# Altium PCB PCB_Audio Output_Single_Layer_with_Jumpers.pcbdoc
Units mm, origin at the board's own origin, x right, y up, seen from the top; angles counter-clockwise.
Board outline 90.97 x 93.4 mm, 2 copper layers (Top Layer, Bottom Layer); 22 components, 13 nets, 85 pads, 0 vias.
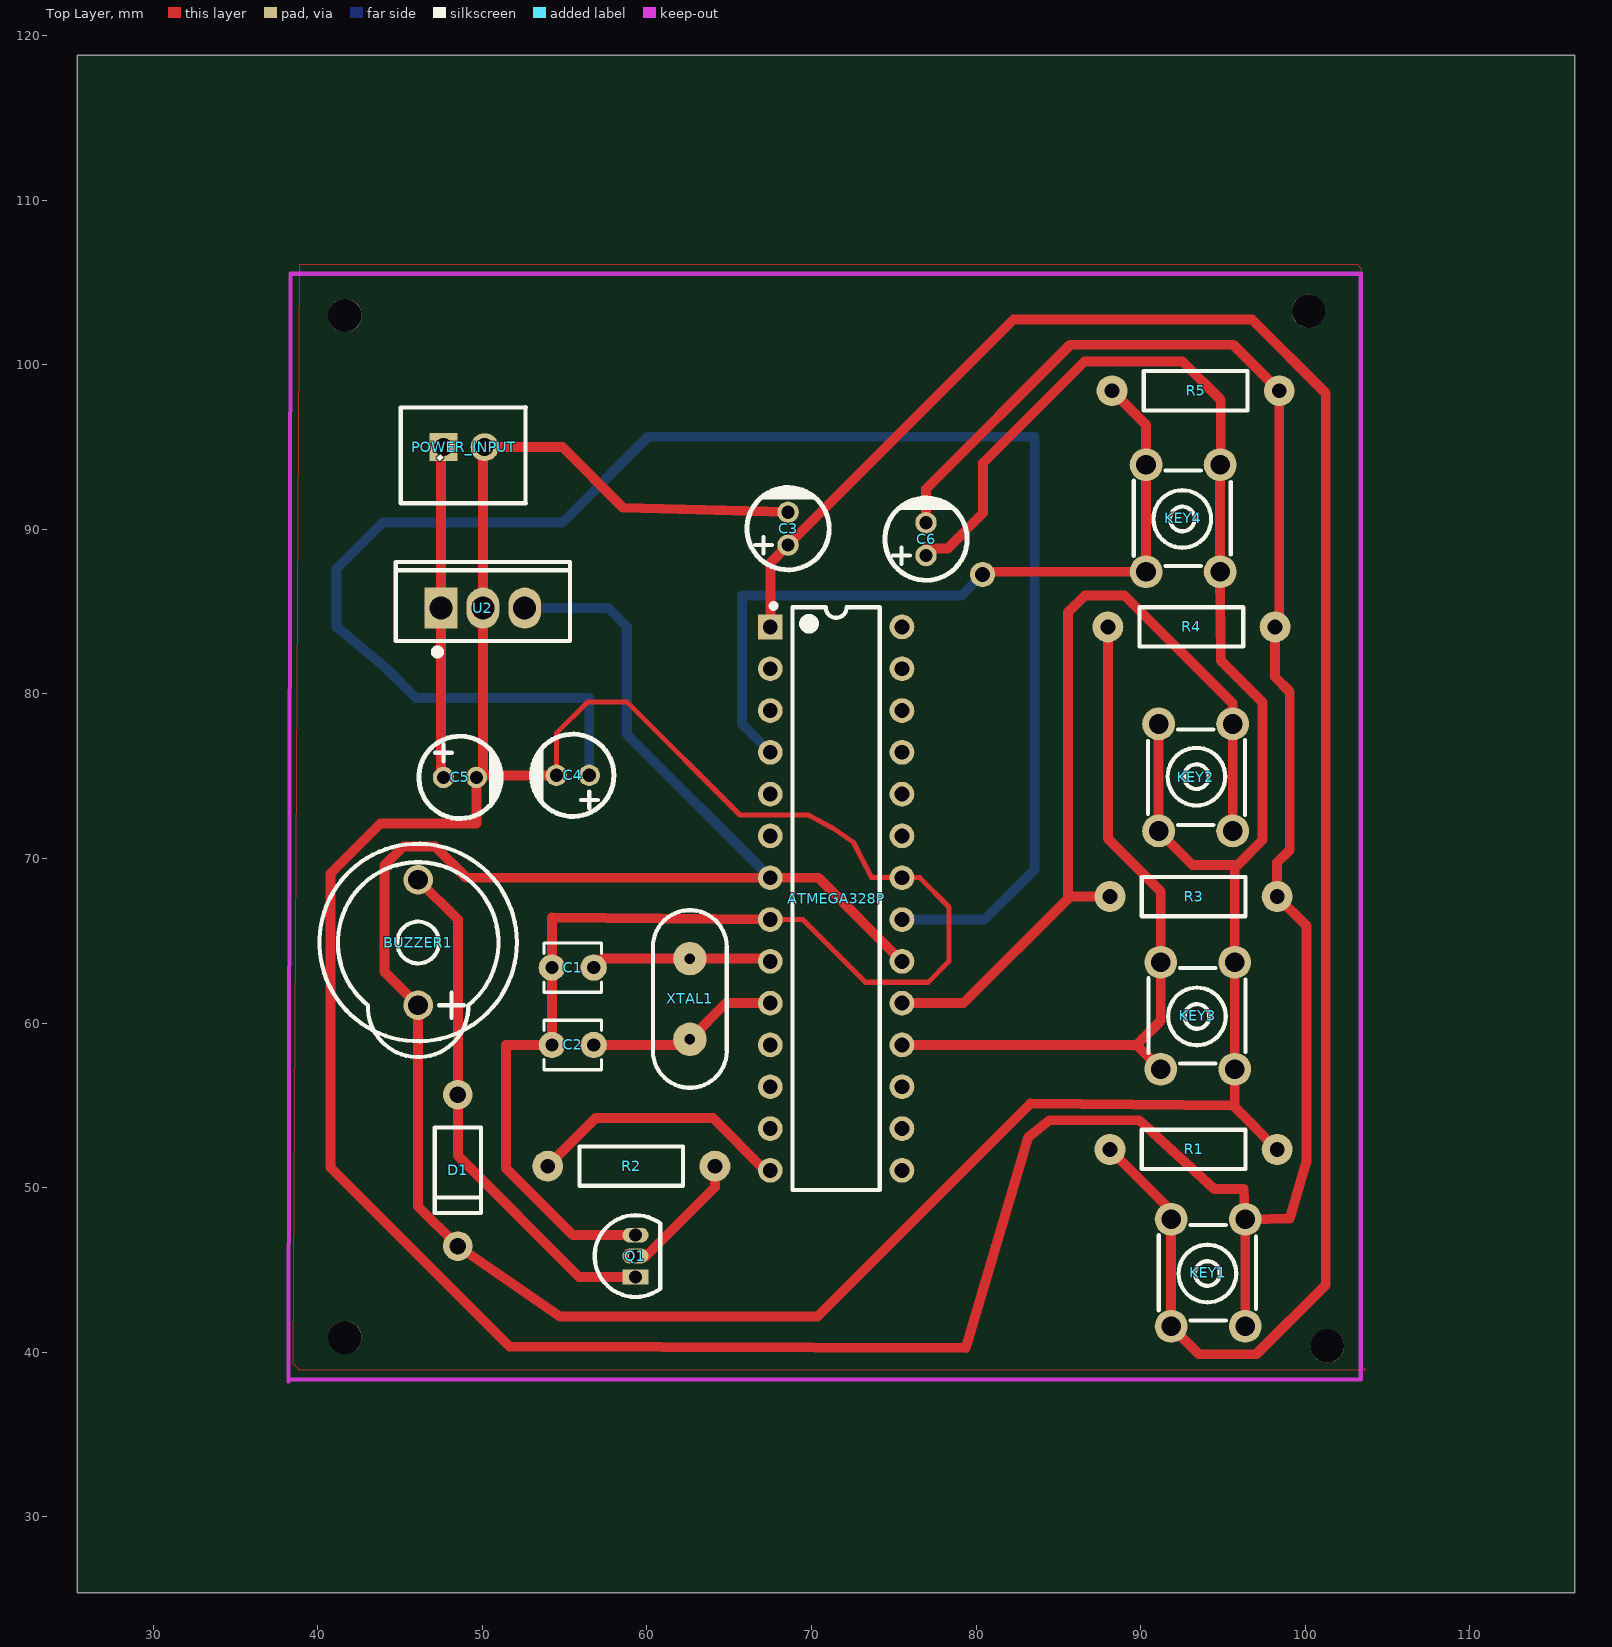
[diagram p0: Top Layer view]
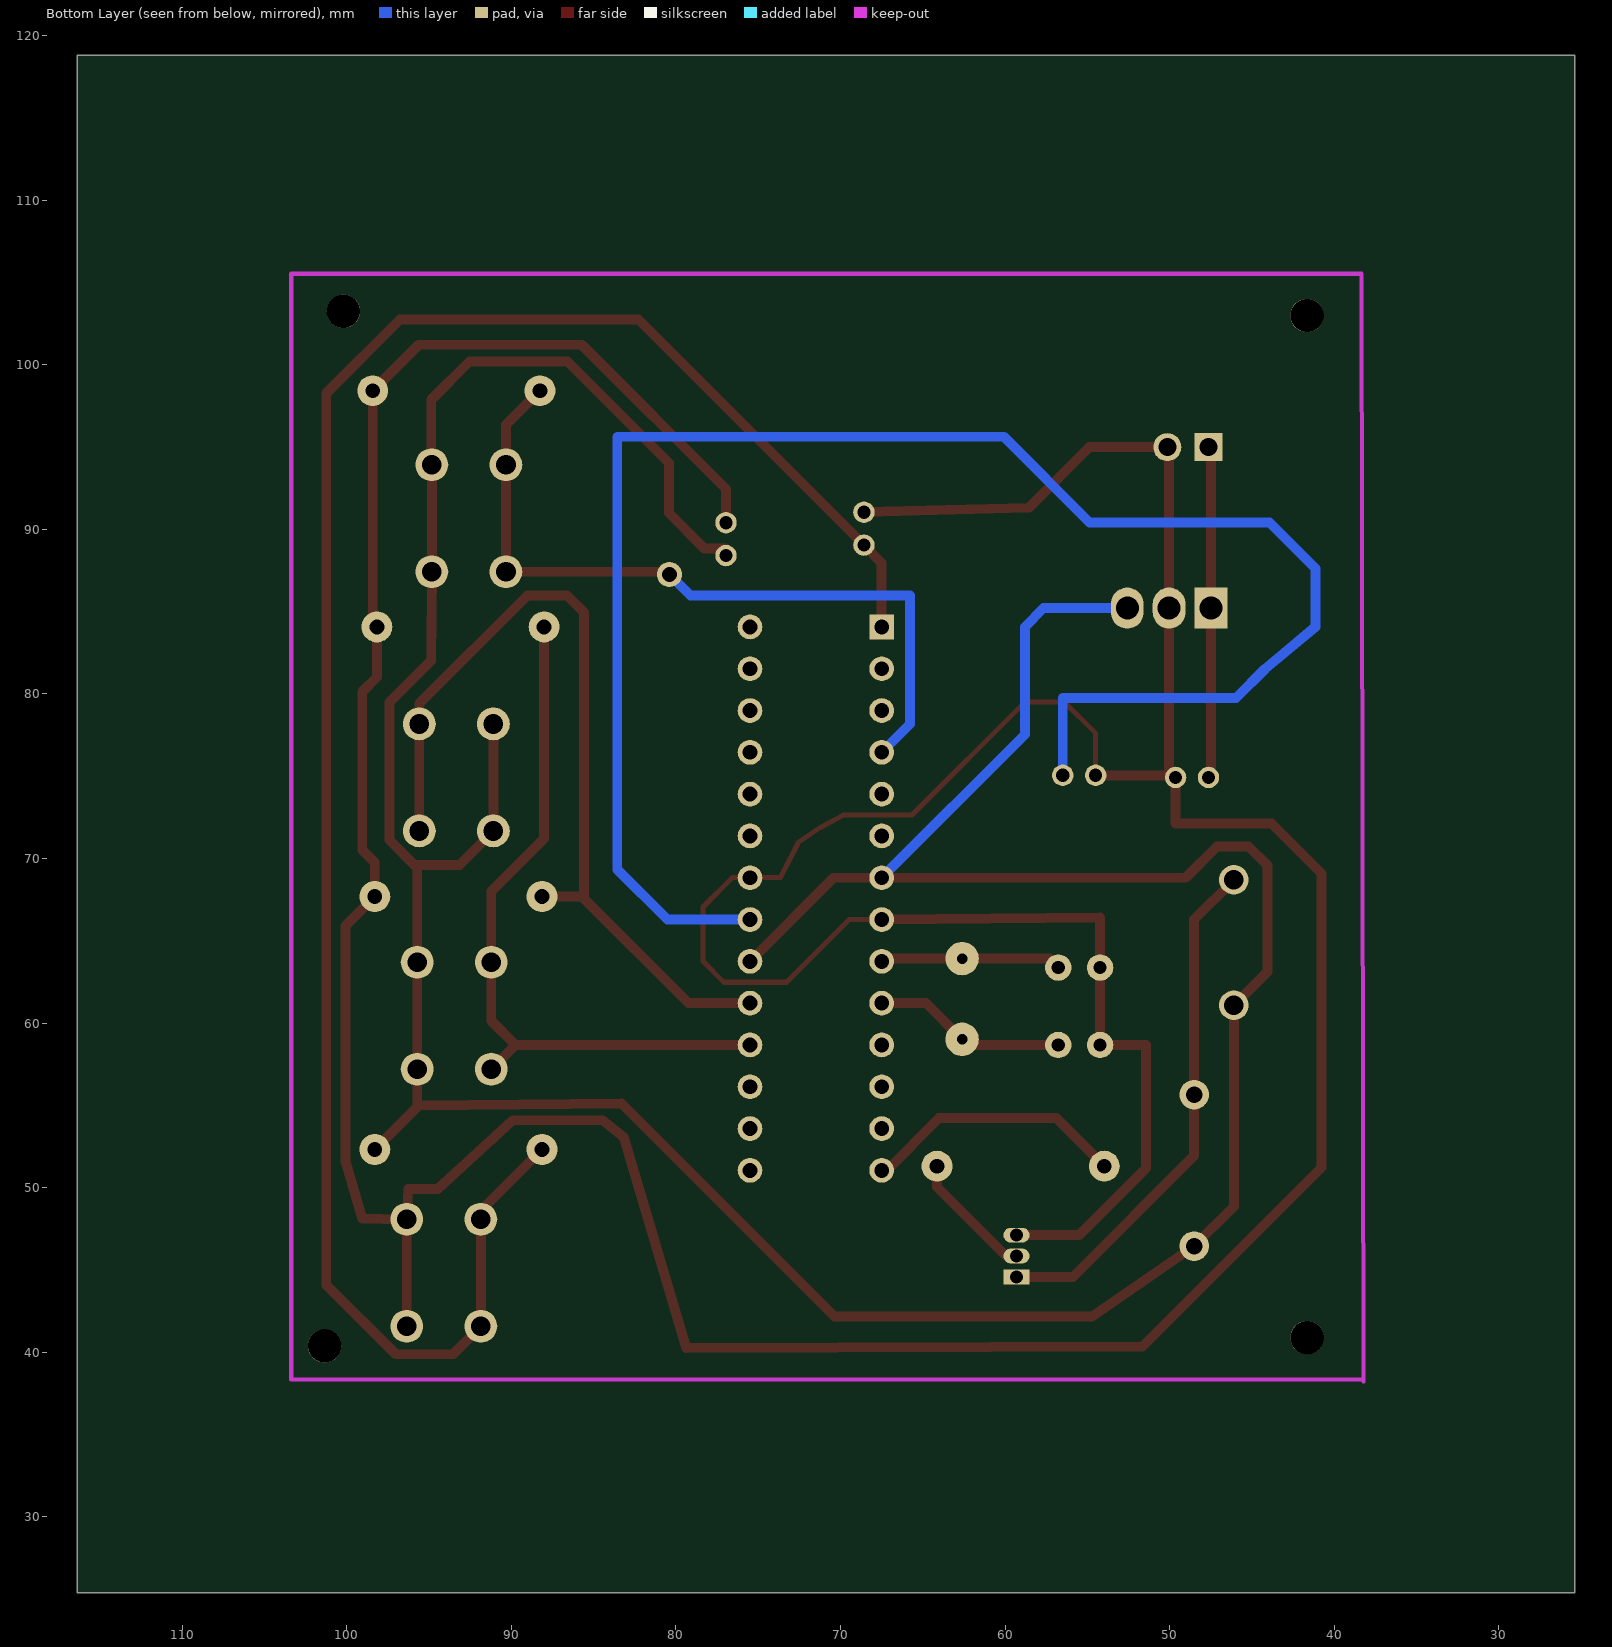
[diagram p1: Bottom Layer view, seen from below]

## Layer stack, top to bottom
Top Layer: signal copper (thickness not stored)
Dielectric: dielectric 0.32, FR-4, Dk 4.8
Bottom Layer: signal copper (thickness not stored)

## Board outline
116.368,25.4 25.4,25.4 25.4,118.798 116.368,118.798

## Components (designator, comment, footprint, x,y, rotation, side; value= is the part's Value field where it differs from the comment)
ATMEGA328P "ATMEGA _328P-PU" DIP-28_L34.6-W7.3-P2.54-LS10.2-BL 71.501,67.564 r270 top
BUZZER1 "5V_BUZZER" DIP-BUZZER-12X6 46.101,64.897 r180 top
C1 "22pF" CAP-TH_L3.5-W3.0-P2.54-D0.8 55.499,63.373 r0 top
C2 "22pF" CAP-TH_L3.5-W3.0-P2.54-D0.8 55.499,58.674 r0 top
C3 "100nF" CAP-TH_BD5.0-P2.00-D0.8-FD 68.58,90.043 r90 top
C4 "100nF" CAP-TH_BD5.0-P2.00-D0.8-FD 55.499,75.057 r180 top
C5 "330nF" CAP-TH_BD5.0-P2.00-D0.8-FD 48.641,74.93 r0 top
C6 "100nF" CAP-TH_BD5.0-P2.00-D0.8-FD 76.962,89.408 r90 top
D1 "1N4001_Diode" DO-41_BD2.4-L4.7-P8.70-D0.9-RD 48.514,51.054 r90 top
KEY1 "Reset_Button" KEY-TH_4P-L6.0-W6.0-P4.50 94.107,44.831 r90 top
KEY2 "PLAY" KEY-TH_4P-L6.0-W6.0-P4.50 93.345,74.93 r270 top
KEY3 "CHANGE SONG" KEY-TH_4P-L6.0-W6.0-P4.50 93.472,60.452 r90 top
KEY4 "STOP" KEY-TH_4P-L6.0-W6.0-P4.50 92.583,90.678 r90 top
POWER_INPUT "JST_2 PIN" CONN-TH_XHB-2A 48.895,94.996 r180 top
Q1 "BC547B_NPN_Transistor" TO-92-3_L4.9-W3.7-P1.27-L 59.309,45.847 r90 top
R1 "10K" AXIAL-0.4 93.218,52.324 r0 top
R2 "220Ω" AXIAL-0.4 59.055,51.308 r0 top
R3 "330Ω" AXIAL-0.4 93.218,67.691 r180 top
R4 "330Ω" AXIAL-0.4 93.091,84.074 r180 top
R5 "330Ω" AXIAL-0.4 93.345,98.425 r180 top
U2 "7805_Regulator" TO-220-3_L10.0-W4.5-P2.54-L 50.038,85.217 r0 top
XTAL1 "16MHz" "16MHZ_OSC [PCB]" 62.611,61.468 r0 top

## Footprints (in the part's own frame and the unit in brackets; to place one, negate y for a bottom-side part, rotate by r counter-clockwise, add the part's x,y. Pads: shape width x height; smd on the part's side, far side on the other; paste and mask are expansions set on the pad)
"16MHZ_OSC [PCB]" [mil]
  round 80 hole 25: 1(0,96.46) 2(0,-96.46)
  silkscreen extent -88,-212 88,212
AXIAL-0.4 [mil]
  round 74 hole 35.4: 1(-200,0) 2(200,0)
  silkscreen extent -124,-47 124,47
CAP-TH_BD5.0-P2.00-D0.8-FD [mm]
  round 1.3 hole 0.8: 1(-1,0) 2(1,0)
  silkscreen extent -2.5,-2.5 2.5,2.5
CAP-TH_L3.5-W3.0-P2.54-D0.8 [mm]
  round 1.6 hole 0.8: 1(-1.27,0) 2(1.27,0)
  silkscreen extent -1.75,-1.5 1.75,1.5
CONN-TH_XHB-2A [mm]
  rect 1.7x1.7 hole 1.1: 1(1.251,0)
  round 1.7 hole 1.1: 2(-1.251,0)
  silkscreen extent -3.75,-2.42 3.86,3.4
DIP-28_L34.6-W7.3-P2.54-LS10.2-BL [mm]
  rect 1.5x1.5 hole 0.9: 1(-16.51,-4)
  round 1.5 hole 0.9: 2(-13.97,-4) 3(-11.43,-4) 4(-8.89,-4) 5(-6.35,-4) 6(-3.81,-4) 7(-1.27,-4) 8(1.27,-4) 9(3.81,-4) 10(6.35,-4) 11(8.89,-4) 12(11.43,-4) 13(13.97,-4) 14(16.51,-4) 15(16.51,4) 16(13.97,4) 17(11.43,4) 18(8.89,4) 19(6.35,4) 20(3.81,4) 21(1.27,4) 22(-1.27,4) 23(-3.81,4) 24(-6.35,4) 25(-8.89,4) 26(-11.43,4) 27(-13.97,4) 28(-16.51,4)
  silkscreen extent -17.94,-3.95 17.7,2.65
DIP-BUZZER-12X6 [mm]
  round 1.8 hole 1.2: 1(0,3.81) 2(0,-3.81)
  silkscreen extent -6,-6 6,6.96
DO-41_BD2.4-L4.7-P8.70-D0.9-RD [mm]
  round 1.8 hole 1: 1(-4.6,0) 2(4.6,0)
  silkscreen extent -2.6,-1.4 2.6,1.4
KEY-TH_4P-L6.0-W6.0-P4.50 [mm]
  round 2 hole 1.2: 1(-3.25,-2.25) 2(3.25,-2.25) 3(3.25,2.25) 4(-3.25,2.25)
  silkscreen extent -2.9,-2.9 2.9,3
TO-92-3_L4.9-W3.7-P1.27-L [mm]
  rect 0.9x1.6 hole 0.8: 1(-1.27,0)
  oval 0.9x1.6 hole 0.8: 2(0,0) 3(1.27,0)
  silkscreen extent -2.48,-1.5 2.48,2.48
TO-220-3_L10.0-W4.5-P2.54-L [mm]
  rect 2x2.5 hole 1.4: 1(-2.54,0)
  oval 2x2.5 hole 1.4: 2(0,0) 3(2.54,0)
  silkscreen extent -5.3,-2.86 5.3,2.8

## Free pads (board coordinates)
  round 1.524 hole 0.914: 2(80.399,87.255)
  round 2.032 hole 2.032 unplated: ""(41.656,40.894) ""(41.656,102.997) ""(100.203,103.251) ""(101.346,40.386)

## Nets (pads, with @x,y where several pads share a name; then routed paths per layer and width w, separated by ;. In a path a pad name is that pad's centre, name@x,y a point inside that pad or via, vN(x,y) a via of type N, cw(c..) or ccw(c..) an arc to the next point about the centre after c; other vN are vias at no path point)
5V: ATMEGA328P.7 ATMEGA328P.20 BUZZER1.1 C6.1 D1.1 KEY2.1 KEY2.2 KEY3.1 KEY3.2 KEY4.1 KEY4.2 R1.2 U2.3 | length 224.8
  Top Layer w0.6: ATMEGA328P.20 70.421,68.834 ATMEGA328P.7 49.022,68.834 47.117,70.739 45.212,70.739 44.069,69.596 44.069,63.119 BUZZER1.1 46.101,48.867 D1.1 54.737,42.164 70.358,42.164 83.312,55.118 95.722,54.986 ; C6.1@76.998,88.842 78.283,88.842 80.427,90.985 80.427,94.033 86.596,100.203 92.545,100.203 94.869,97.879 KEY4.2@94.869,94.361 ; KEY2.1@91.095,78.179 KEY2.2 93.162,69.614 95.537,69.614 ; KEY4.2@94.833,93.927 KEY4.1 94.869,82.042 97.409,79.499 97.409,71.12 95.903,69.614 95.537,69.614 ; R1.2 95.722,54.9 95.722,54.986 ; 95.537,69.614 95.722,69.614 95.722,63.701 KEY3.1 95.722,54.986
  Bottom Layer w0.6: U2.3 57.658,85.217 58.801,84.074 58.801,77.534 ATMEGA328P.7
BUZZER: ATMEGA328P.14 R2.1 | length 16.1
  Top Layer w0.6: R2.1 56.896,54.229 64.008,54.229 67.183,51.054 ATMEGA328P.14
BUZZER1_2: BUZZER1.2 D1.2 Q1.1 | length 31.6
  Top Layer w0.6: BUZZER1.2 48.514,66.294 D1.2 48.514,51.943 55.88,44.577 58.151,44.577 Q1.1
CHANGE: ATMEGA328P.18 KEY3.3 KEY3.4 R4.2 | length 43.7
  Top Layer w0.6: R4.2 88.011,71.204 91.222,67.993 91.222,63.701 91.222,60.145 89.751,58.674 KEY3.4
  Top Layer w0.605: ATMEGA328P.18 89.751,58.674
GND: ATMEGA328P.8 ATMEGA328P.22 C1.1 C2.1 C3.2 C4.2 C5.2 C6.2 KEY1.1 KEY1.2 POWER_INPUT.2 Q1.3 R3.1 R4.1 R5.1 U2.2 | length 328.2
  Top Layer w0.305: C4.2 54.498,77.612 56.388,79.502 57.404,79.502 58.801,79.502 65.659,72.644 69.842,72.644 71.247,71.882 72.537,71.006 73.66,68.834 ATMEGA328P.22 76.581,68.834 78.359,67.056 78.359,63.754 77.089,62.484 73.279,62.484 69.469,66.294 ATMEGA328P.8
  Top Layer w0.6: C4.2 C5.2@50.038,75.057 ; Q1.3 55.499,47.117 51.435,51.181 51.435,58.674 C2.1 C1.1 54.229,66.421 ATMEGA328P.8 ; C3.2@68.58,91.059 58.547,91.313 54.864,94.996 POWER_INPUT.2 50.038,94.888 50.038,91.044 U2.2 C5.2@50.038,75.057 ; C6.2 76.962,92.456 85.725,101.219 95.631,101.219 R5.1 98.425,84.328 R4.1 98.171,81.026 99.06,80.137 99.06,70.516 98.298,69.754 R3.1 100.076,65.913 100.076,63.373 100.076,51.554 99.06,48.133 96.604,48.08 KEY1.2@96.357,48.08 ; KEY1.1 KEY1.2@96.357,48.08 ; C5.2@50.038,75.057 49.911,74.93 C5.2 49.642,72.136 43.815,72.136 40.767,69.088 40.767,51.232 51.646,40.353 79.375,40.259 83.185,53.086 84.455,54.102 89.916,54.102 94.488,49.911 96.266,49.911 KEY1.2@96.357,48.08
PLAY: ATMEGA328P.19 KEY2.3 KEY2.4 R3.2 | length 54.3
  Top Layer w0.6: ATMEGA328P.19 79.248,61.214 85.725,67.691 86.451,67.691 ; R3.2 86.451,67.691 ; KEY2.3 95.595,78.179 95.595,79.411 89.027,85.979 86.614,85.979 85.598,84.963 85.598,67.691 86.451,67.691
Q1_2: Q1.2 R2.2 | length 7.8
  Top Layer w0.6: Q1.2 59.944,45.847 64.135,50.038 R2.2
STOP: ATMEGA328P.4 KEY4.3 KEY4.4 pad.2 R5.2 | length 47.2
  Top Layer w0.6: pad.2 80.571,87.427 KEY4.4 90.333,93.927 90.333,96.357 R5.2
  Bottom Layer w0.6: ATMEGA328P.4 65.786,78.169 65.786,85.979 79.123,85.979 pad.2
U1_1: ATMEGA328P.1 C3.1 KEY1.3 KEY1.4 R1.1 | length 123.9
  Top Layer w0.6: ATMEGA328P.1 67.501,87.963 C3.1 82.281,102.743 96.774,102.743 101.247,98.27 101.247,44.097 97.028,39.878 93.558,39.878 KEY1.4 91.857,48.08 91.857,48.605 R1.1
U1_9: ATMEGA328P.9 C1.2 XTAL1.1 | length 11
  Top Layer w0.6: C1.2 57.314,63.918 XTAL1.1 67.336,63.918 ATMEGA328P.9
U1_10: ATMEGA328P.10 C2.2 XTAL1.2 | length 11.8
  Top Layer w0.6: C2.2 62.267,58.674 XTAL1.2 64.807,61.214 ATMEGA328P.10
U1_21: ATMEGA328P.21 C4.1 | length 106.6
  Bottom Layer w0.6: C4.1 56.499,79.756 45.974,79.756 44.196,81.534 41.148,84.074 41.148,87.63 43.942,90.424 54.864,90.424 60.071,95.631 83.566,95.631 83.566,69.342 80.518,66.294 ATMEGA328P.21
VCC: C5.1 POWER_INPUT.1 U2.1 | length 20.1
  Top Layer w0.6: POWER_INPUT.1@47.498,94.996 47.498,86.825 U2.1 47.498,75.072 C5.1
pads on no net: ATMEGA328P.2 ATMEGA328P.3 ATMEGA328P.5 ATMEGA328P.6 ATMEGA328P.11 ATMEGA328P.12 ATMEGA328P.13 ATMEGA328P.15 ATMEGA328P.16 ATMEGA328P.17 ATMEGA328P.23 ATMEGA328P.24 ATMEGA328P.25 ATMEGA328P.26 ATMEGA328P.27 ATMEGA328P.28

## Polygon pours and split planes (outlines as drawn)
GND on Top Layer (solid): 38.898,106.098 103.16,106.098 103.414,105.844 103.414,39.169 103.668,38.915 38.898,38.915 38.517,39.296

## Silkscreen, mask and mechanical layers (free items; w line width, h text height)
Bottom Solder:
  lines w0.702: 65.786,78.169 67.501,76.454 65.786,78.169 ; 65.786,78.169 65.786,85.979 ; 65.786,78.169 65.786,85.979 ; 65.786,85.979 79.123,85.979 ; 65.786,85.979 79.123,85.979 ; 79.123,85.979 80.399,87.255 79.123,85.979